# Altium PCB sensorbox.PcbDoc (part 1 of 2)
Units mil, origin at the board's own origin, x right, y up, seen from the top; angles counter-clockwise.
Board outline 2706 x 4143.13 mil, 2 copper layers (Top Layer, Bottom Layer), stack 61.855 mil thick; 118 components, 125 nets, 651 pads, 573 vias.
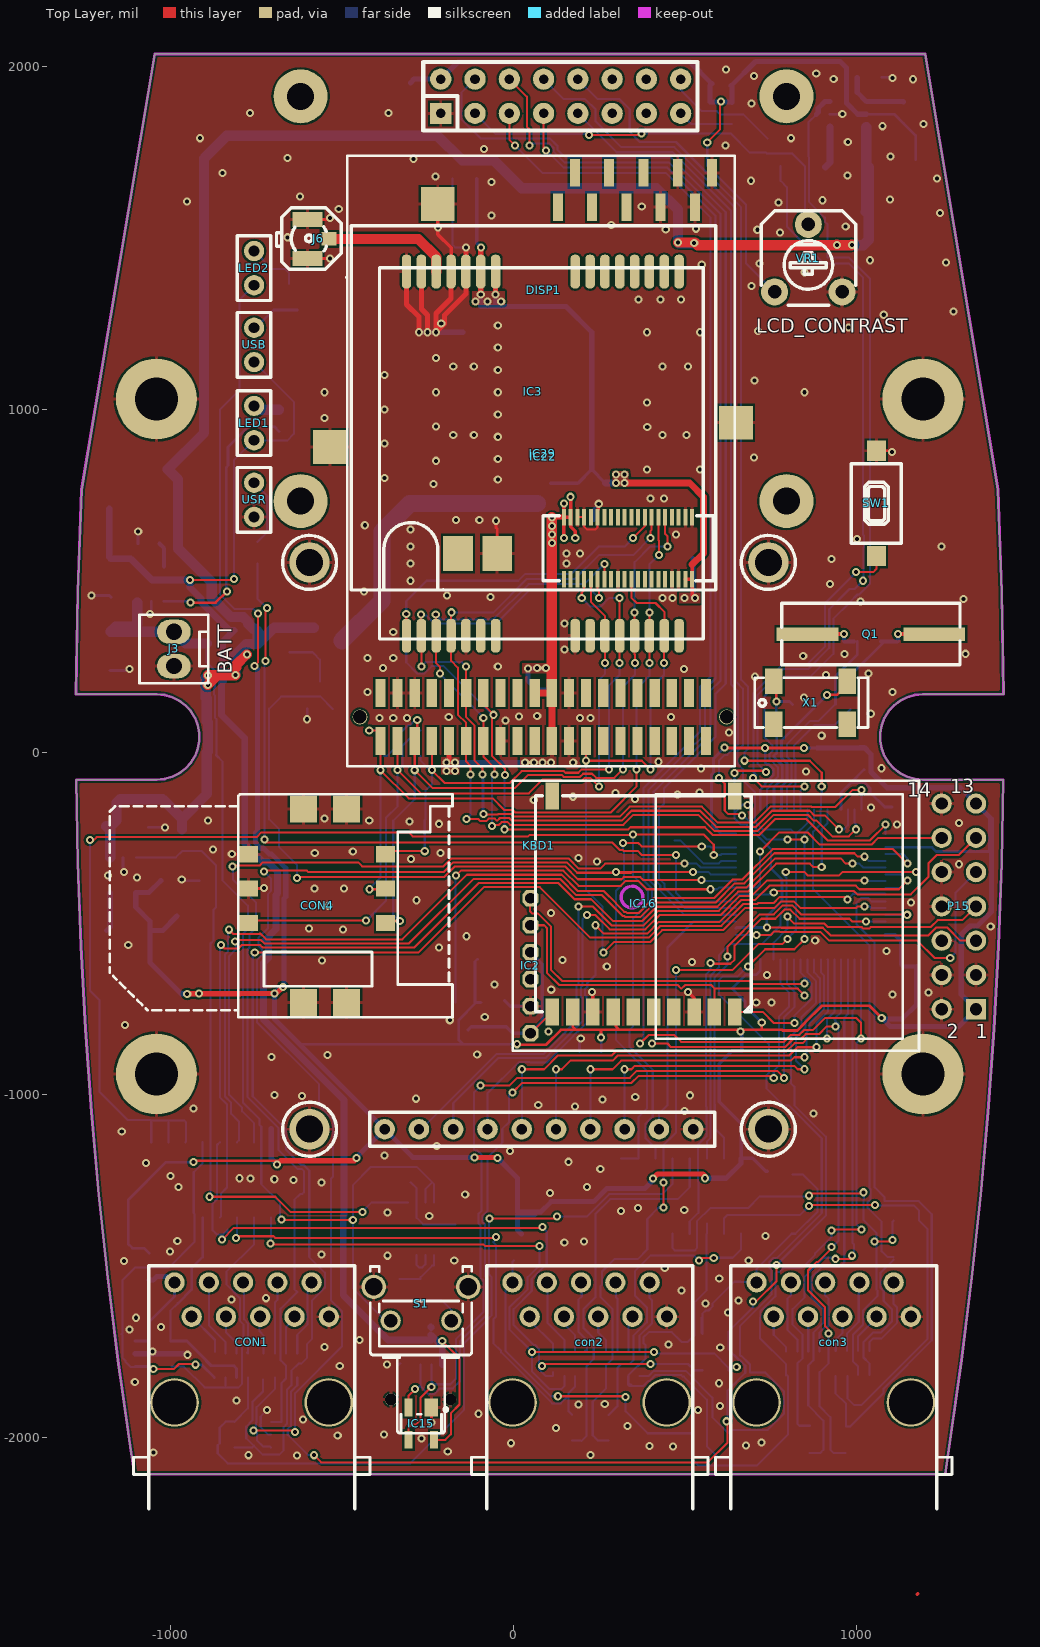
[diagram p0: Top Layer view]
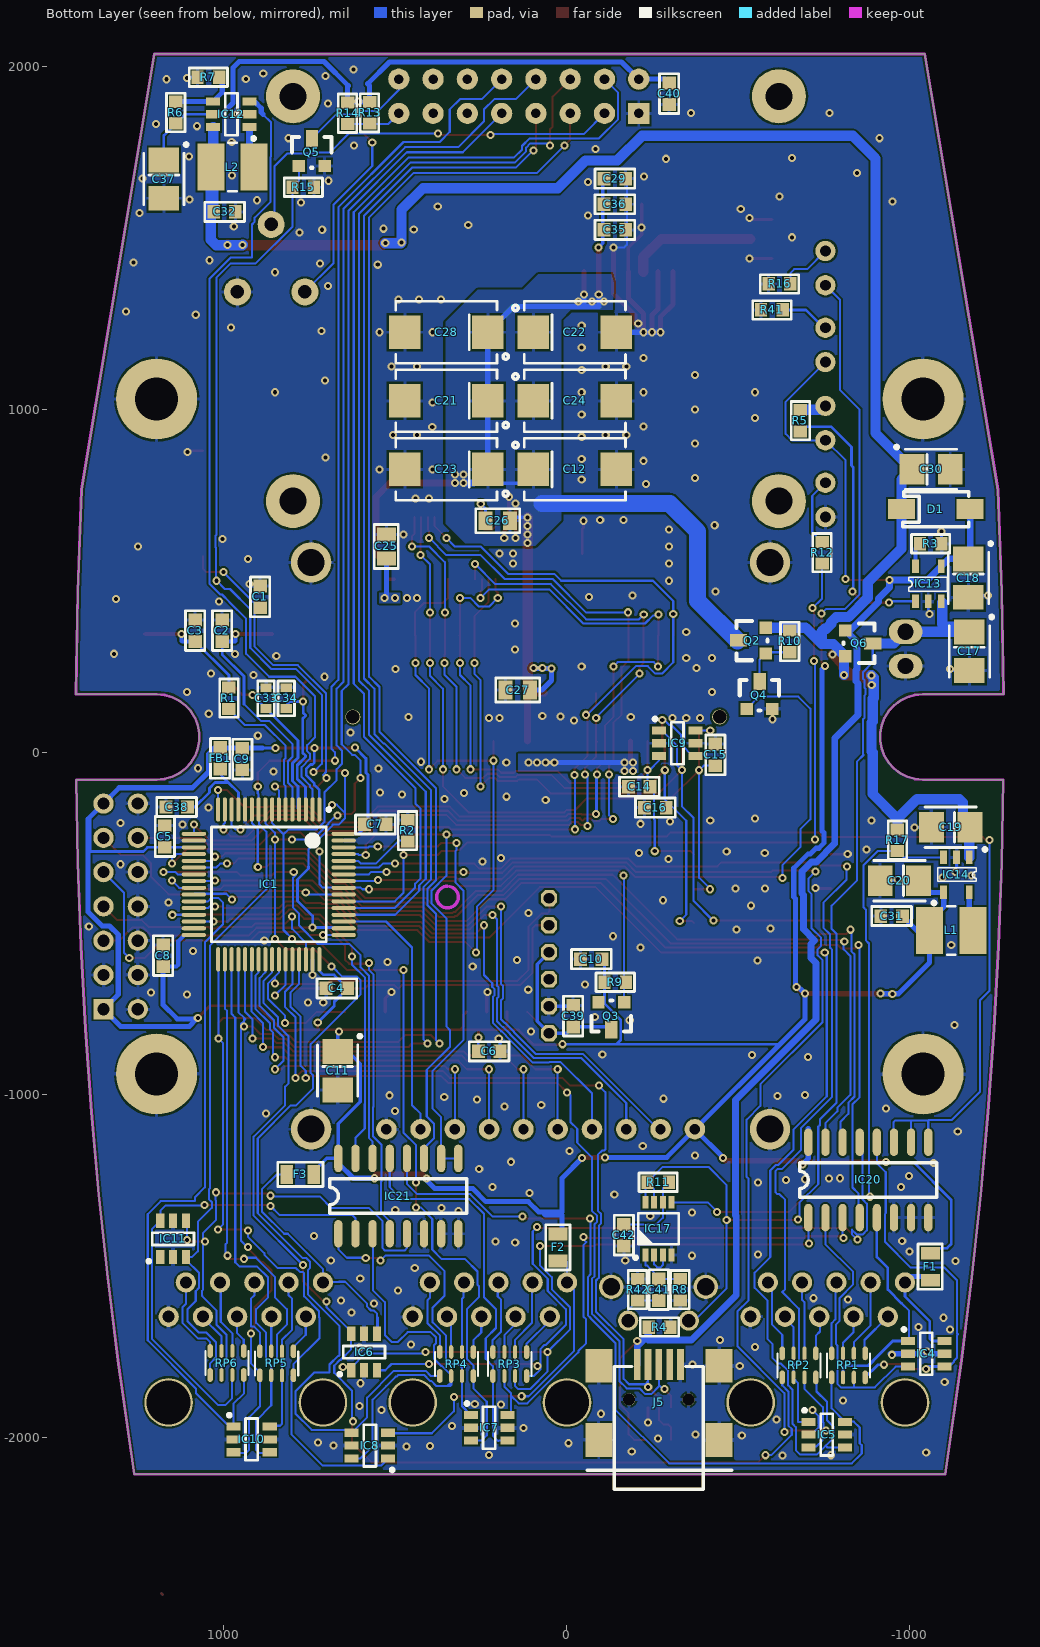
[diagram p1: Bottom Layer view, seen from below]
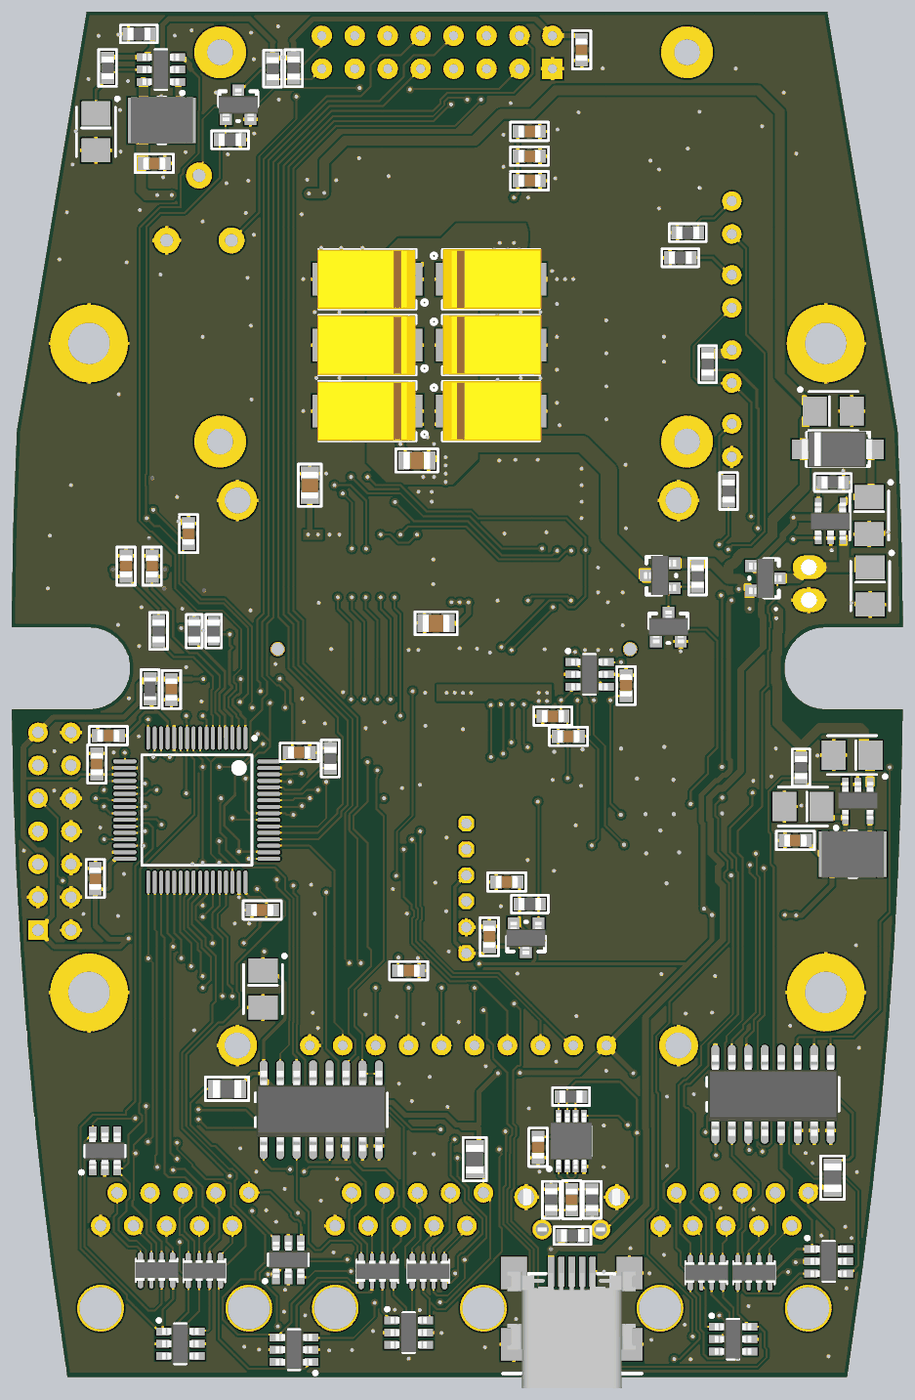
[diagram p3: 3D render of the assembled board from below, using the file's embedded part models]

## Layer stack, top to bottom
Top Layer: signal copper 1.4
Dielectric: core 59.0551, FR-4, Dk 4.8
Bottom Layer: signal copper 1.4

## Board outline
-1105.91,-2106.3 1260.72,-2106.31 1307.88,-1773.71 1337.8,-1532.86 1363.57,-1291.53 1385.16,-1049.79 1402.58,-807.71 1415.83,-565.37 1424.89,-322.83 1429.76,-80.18 1194.5,-80.18 1171.62,-78.06 1149.52,-71.77 1128.95,-61.53 1110.62,-47.68 1095.14,-30.7 1083.04,-11.16 1074.74,10.26 1070.52,32.85 1070.52,55.83 1074.74,78.42 1083.04,99.84 1095.14,119.38 1110.62,136.36 1128.96,150.21 1149.52,160.45 1171.62,166.74 1194.5,168.86 1430.42,168.86 1425.38,467.45 1414.02,765.87 1202.17,2036.82 -1045.83,2036.82 -1259.18,765.88 -1270.55,467.46 -1275.59,168.87 -1039.68,168.87 -1016.8,166.75 -994.7,160.46 -974.13,150.21 -955.79,136.37 -940.31,119.39 -928.22,99.85 -919.91,78.42 -915.69,55.84 -915.69,32.86 -919.92,10.27 -928.22,-11.15 -940.31,-30.69 -955.79,-47.67 -974.13,-61.52 -994.7,-71.76 -1016.8,-78.05 -1039.68,-80.17 -1274.94,-80.17 -1270.07,-322.82 -1261.01,-565.36 -1247.76,-807.7 -1230.34,-1049.77 -1208.75,-1291.52 -1182.99,-1532.85 -1153.07,-1773.7

## Design rules (kind name [scope] priority, off if disabled: settings)
Clearance [All] p1: gap=6
ComponentClearance Obudowa [(InComponentClass('kolizja z obudowa'))] p1: gap=0 collisioncheckmode=3 verticalgap=0 showdistances=FALSE // Ignorujemy kolizje z obudowa
ComponentClearance modemy_GSM [(InComponentClass('modemy_GSM')) vs (InComponentClass('modemy_GSM'))] p2: gap=0 collisioncheckmode=3 verticalgap=0 showdistances=FALSE
ComponentClearance ComponentClearance_1 [All] p3: gap=10 collisioncheckmode=3 verticalgap=0 showdistances=FALSE
HoleSize [All] p1: absolutevalues=TRUE maxlimit=200 minlimit=11.81 maxpercent=80.000 minpercent=20.000
MinimumSolderMaskSliver [All] p1: minsoldermaskwidth=0
PlaneConnect [All] p1: planeconnectstyle=Direct reliefexpansion=20 reliefentries=4 reliefconductorwidth=10 reliefairgap=10
PolygonConnect PolygonConnect_1 [(InPadClass('All Pads'))] p1: connectstyle=Relief reliefconductorwidth=10 reliefentries=4 polygonreliefangle="90 Angle"
PolygonConnect [All] p2: connectstyle=Direct reliefconductorwidth=10 reliefentries=4 polygonreliefangle="90 Angle"
RoomDefinition U_sensorbox_1 [InComponentClass('U_sensorbox_1')] p1 off: confinementstyle=ConfineIn formatcopy=TRUE lockcomponents=FALSE outline 574,-1650 647,-1650 647,-1094.96 574,-1094.96
RoomDefinition supply_kbd_lcd [InComponentClass('supply_kbd_lcd')] p2 off: confinementstyle=ConfineIn formatcopy=TRUE lockcomponents=FALSE outline 695,-1331 -449,-1331 -449,216 695,216
RoomDefinition "alt modem" [InComponentClass('alt modem')] p3 off: confinementstyle=ConfineIn formatcopy=TRUE lockcomponents=FALSE outline -11417.32,-5314.96 -9417.32,-5314.96 -9417.32,-4314.96 -11417.32,-4314.96
RoomDefinition U_rj50 [InComponentClass('U_rj50')] p4 off: confinementstyle=ConfineIn formatcopy=TRUE lockcomponents=FALSE outline -11417.32,-5314.96 -9417.32,-5314.96 -9417.32,-4314.96 -11417.32,-4314.96
RoomDefinition mikrokontroler [InComponentClass('mikrokontroler')] p5 off: confinementstyle=ConfineIn formatcopy=TRUE lockcomponents=FALSE outline 1140,-1750 844.25,-1750 844.25,-1950 1140,-1950
RoutingVias [All] p1: holewidth=11.81 width=23.62 viastyle="Through Hole" minholewidth=11.81 minwidth=23.62 maxholewidth=15.75 maxwidth=31.5
SilkToSilkClearance [All] p1: silktosilkclearance=0
SilkscreenOverComponentPads [All] p1: minsilkscreentomaskgap=0
SolderMaskExpansion [All] p1: expansion=4
ViasUnderSMD [All] p1: allowed=FALSE
Width [All] p1: maxlimit=100 minlimit=6 preferedwidth=10 minimp=50.000000 maximp=50.000000 favimp=50.000000
22 further rules are at their usual default settings.

## Classes and differential pairs
component class U_rj50: con1 con2 con3 F1 F2 F3 IC4 IC5 IC6 IC7 IC8 IC10 IC11 RP1 RP2 RP3 RP4 RP5 RP6
component class U_sensorbox_1: C12 C14 C15 C16 C21 C22 C23 C24 C25 C26 C28 C39 CON4 IC2 IC3 IC9 IC16 IC20 IC21 Q2 Q3 Q4 R9 R10
component class "alt modem": C27 C29 C35 C36 IC22 IC29 J6
component class mikrokontroler: C1 C2 C3 C4 C5 C6 C7 C8 C9 C10 C11 C33 C34 C38 FB1 IC1 P15 Q1 R1 R2 R12 SW1 USR X1
component class supply_kbd_lcd: C17 C18 C19 C20 C30 C31 C32 C37 C40 C41 C42 D1 DISP1 IC12 IC13 IC14 IC15 IC17 J3 J5 KBD1 L1 L2 LED1 LED2 Q5 Q6 R3 R4 R5 R6 R7 R8 R11 R13 R14 R15 R16 R17 R41 R42 S1 USB VR1

## Components (designator, comment, footprint, x,y, rotation, side; value= is the part's Value field where it differs from the comment)
C1 "100n" 0603C 893,453 r90 bottom
C2 "22p" 0603C 1003.94,354.33 r90 bottom locked
C3 "22p" 0603C 1082.68,354.33 r90 bottom locked
C4 "100n" 0603C 669.29,-688.98 r0 bottom locked
C5 "100n" 0603C 1171.26,-246.06 r90 bottom locked
C6 "100n" 0603C 225,-873 r180 bottom
C7 "100n" 0603C 557,-211 r180 bottom
C8 "100n" 0603C 1176.14,-593.7 r90 bottom locked
C9 "100n" 0603C 945,-20 r270 bottom
C10 "1u" 0603C -73,-604 r0 bottom
C11 "10u/10V" 1411_SMDB 667,-929 r270 bottom
C12 "ET220/10D-JP" 2917_SMDD -25,825 r180 bottom locked
C14 "100n" 0603C -213,-101 r0 bottom
C15 "33p" 0603C -435,-8 r90 bottom
C16 "33p" 0603C -260,-162 r0 bottom
C17 "10u/6,3V" 1411_SMDB -1176,294 r270 bottom
C18 "10u/6,3V" 1411_SMDB -1173,508 r270 bottom
C19 "10u/6,3V" 1411_SMDB -1121,-219 r0 bottom
C20 "10u/6,3V" 1411_SMDB -972,-375 r0 bottom
C21 "ET220/10D-JP" 2917_SMDD 350,1025 r0 bottom locked
C22 "ET220/10D-JP" 2917_SMDD -25,1225 r180 bottom
C23 "ET220/10D-JP" 2917_SMDD 350,825 r0 bottom locked
C24 "ET220/10D-JP" 2917_SMDD -25,1025 r180 bottom
C25 "10u/10V" 0805C 525,600 r270 bottom locked
C26 "10u/10V" 0805C 200,675 r0 bottom locked
C27 "10u" 0805C 141.73,181.1 r0 bottom
C28 "ET220/10D-JP" 2917_SMDD 350,1225 r0 bottom locked
C29 "1u" 0603C -141.73,1673.23 r180 bottom
C30 "10u/6,3V" 1411_SMDB -1064,825 r180 bottom
C31 "100n" 0603C -949,-478 r0 bottom
C32 "100n" 0603C 997,1576 r180 bottom
C33 "u1" 0603 875.98,157.48 r90 bottom locked
C34 "u1" 0603 816.93,157.48 r90 bottom locked
C35 "10p" 0603C -141.73,1523.62 r180 bottom
C36 "33p" 0603C -141.73,1598.43 r180 bottom
C37 "10u/6,3V" 1411_SMDB 1174,1672 r270 bottom
C38 "1u" 0603C 1136.61,-160 r0 bottom
C39 "100n" 0603C -20,-770 r90 bottom
C40 "100n" 0603C -300,1921 r270 bottom
C41 "1n" 0603C -270,-1568 r90 bottom
C42 "100n" 0603C -168,-1409 r90 bottom
CON1 "TJACKG10P10C06" TJACKM10P10C03Y-LF -1063,-2207 r0 top locked (schematic designator con1)
con2 "TJACKG10P10C06" TJACKM10P10C03Y-LF -77,-2207 r0 top locked
con3 "TJACKG10P10C06" TJACKM10P10C03Y-LF 635,-2207 r0 top locked
CON4 "CARD-SIME6C10" CON_CARD-SIME6C10 -572,-448 r270 top locked
D1 "SS14" DO-214AC/SMA -1078,709 r0 bottom
DISP1 "PBD16S + LCMFD0802C6NBLWC" IDC16 -698.82,2047.24 r0 top locked
F1 "RFSI005" 0805R -1062,-1501 r90 bottom
F2 "RFSI005" 0805R 24,-1445 r90 bottom
F3 "RFSI005" 0805R 776,-1232 r180 bottom
FB1 "100R/1A" 0603L 1010,-18 r270 bottom
IC1 "STM32F103RBT6" LQFP64_N 867.95,-385.83 r270 bottom locked
IC2 "SKM53" RF_GPS_SKM53 50,-820 r180 top locked
IC3 "HiLo modem" MOLEX_54102-0403 335,595 r0 top locked
IC4 "PESD3V3S4UD" SOT23-6 -1050,-1755 r180 bottom locked
IC5 "PESD3V3S4UD" SOT23-6 -760,-1991 r180 bottom locked
IC6 "PESD3V3S4UD" SOT23-6 590,-1750 r90 bottom locked
IC7 "PESD3V3S4UD" SOT23-6 225,-1971 r180 bottom
IC8 "PESD3V3S4UD" SOT23-6 573,-2023 r0 bottom
IC9 "PESD3V3S4UD" SOT23-6 -324,26 r180 bottom
IC10 "PESD3V3S4UD" SOT23-6 918,-2005 r180 bottom locked
IC11 "PESD3V3S4UD" SOT23-6 1147,-1420 r90 bottom locked
IC12 "MCP1624" SOT23-6 977,1861 r0 bottom
IC13 "MCP73831T-2ACI" SOT23-5 -1056,491 r90 bottom
IC14 "MCP1603T-330I" SOT23-5 -1138,-358 r270 bottom
IC15 "PRTR5V0U2X" sot143b -270,-1957 r180 top
IC16 "GPS-FGPMMOPA6B" GPS-FGPMMOPA6B 380,-442.5 r90 top locked
IC17 "74LVC1G74DP" SOP65P400X110-8N -269,-1390 r90 bottom
IC20 "74HC4053D" SO-16 -706,-1358 r90 bottom
IC21 "74HC4053D" SO-16 665,-1405 r90 bottom locked
IC22 "PBHTD40SPP + PBHTS10S-ZTE + MG3006" MG3006 580,1640 r0 top locked
IC29 "QUECTEL_M72" QUECTEL_M72 -390,330 r90 top locked
J3 "WF02S-LF" CON_WF02S-LF -990,351 r180 top
J5 "USBMS1B5-CV" USBMS1B5-CV -270,-1741 r180 bottom locked
J6 "U.FL-R-SMT-1(10)" CON_UFL_HIROSE_RECEPTACLE -600,1440 r270 top
KBD1 "PB10S-LF" KBD -712.4,632.28 r0 top locked
L1 "DLPW1812-100" PW4532 -1123,-520 r0 bottom
L2 "DLPW1812-100" PW4532 974,1707 r180 bottom
LED1 "L-13ID" LED_L-13ID -756,960 r90 top
LED2 "L-13GD" LED_L-13GD -756,1412 r90 top
P15 "PLMD14S-LF" HDR2X7H 1350,-750 r90 top
Q1 "8MHz" HC-49SM 1043.31,344.49 r0 top locked
Q2 "DMP2035U" sot-23 -582,288 r90 bottom
Q3 "DMP2035U" sot-23 -169,-730 r0 bottom
Q4 "BSS138" sot-23 -526,126 r180 bottom
Q5 "BSS138" SOT-23 780,1710 r180 bottom
Q6 "DMP2035U" sot-23 -814,355 r270 bottom
R1 "100" 0603R 984.25,157.48 r270 bottom locked
R2 "10k" 0603R 463,-229 r90 bottom
R3 "2k1" 0603R -1063,608 r0 bottom
R4 "10k" 0603R -272,-1677 r0 bottom
R5 "1k" 0603R -683,967 r270 bottom
R6 "30k" 0603R 1139,1866 r270 bottom
R7 "10k" 0603R 1044,1969 r180 bottom
R8 "1k" 0603R -332,-1568 r90 bottom
R9 "10k" 0603R -143,-671 r0 bottom
R10 "10k" 0603R -652,323 r90 bottom
R11 "1M" 0603R -268,-1255 r180 bottom
R12 "220R" 0603R -746,582 r90 bottom
R13 "100R" 0603R 574,1865 r90 bottom
R14 "100R" 0603R 638,1864 r90 bottom
R15 "10k" 0603R 767,1648 r0 bottom
R16 "1k" 0603R -622,1366 r0 bottom
R17 "1k" 0603R -966,-257 r90 bottom
R41 "1k" 0603R -600,1290 r0 bottom
R42 "1M" 0603R -208,-1568 r90 bottom
RP1 "RAC4X101" CAY-16 -823,-1789 r270 bottom locked
RP2 "RAC4X101" CAY-16 -679,-1789 r270 bottom locked
RP3 "RAC4X101" CAY-16 165,-1785 r270 bottom locked
RP4 "RAC4X101" CAY-16 320,-1785 r270 bottom locked
RP5 "RAC4X101" CAY-16 845,-1783 r270 bottom locked
RP6 "RAC4X101" CAY-16 990,-1782 r270 bottom locked
S1 "TACTR75H84B160" PB_ALPS_SKHHLQA010 -269,-1609 r90 top locked
SW1 "TACTD37H25I180" TACTD37H25I180 1059.45,879.33 r270 top locked
USB "L-13YD" LED_L-13YD -756,1188 r90 top
USR "L-13YD" LED_L-13YD -756,736 r270 top
VR1 "10k" POT_RM6v 861,1441 r180 top
X1 "32.768kHz" crystal_85SMX 944.88,206.69 r180 top locked

## Footprints (in the part's own frame and the unit in brackets; to place one, negate y for a bottom-side part, rotate by r counter-clockwise, add the part's x,y. Pads: shape width x height; smd on the part's side, far side on the other; paste and mask are expansions set on the pad)
0603 [mm]
  rect 0.65x0.85 smd: 1(-0.775,0) 2(0.775,0)
  silkscreen extent -1.3,-0.61 1.27,0.61, body extent -0.87,-0.47 0.88,0.48, height 0.55
0603C [mm]
  rect 0.95x1 smd: 1(-0.8,0) 2(0.8,0)
  silkscreen extent -1.47,-0.71 1.47,0.71, body extent -0.87,-0.47 0.88,0.48, height 0.87
0603L [mm]
  rect 0.95x1 smd: 1(-0.8,0) 2(0.8,0)
  silkscreen extent -1.47,-0.71 1.47,0.71, body extent -0.87,-0.47 0.88,0.48, height 0.7
0603R [mm]
  rect 0.9x1 smd: 1(-0.8,0) 2(0.8,0)
  silkscreen extent -1.42,-0.69 1.42,0.69, body extent -0.87,-0.47 0.88,0.48, height 0.55
0805C [mm] "Molded Capacitor, 2-Leads, Body 3,2x1,6mm, IPC Medium Density"
  rect 1.05x1.4 smd: 1(-0.9,0) 2(0.9,0)
  silkscreen extent -1.63,-0.89 1.63,0.89, body extent -1.05,-0.67 1.05,0.68, height 1.25
0805R [mm]
  rect 0.95x1.4 smd: 1(-1,0) 2(1,0)
  silkscreen extent -1.68,-0.89 1.68,0.91, body extent -1.1,-0.67 1.1,0.68, height 0.6
1411_SMDB [mm]
  rect 1.85x2.25 smd: 1(-1.425,0) 2(1.425,0)
  silkscreen extent -2.67,-1.5 1.9,1.77, body extent -1.85,-1.5 1.85,1.5, height 2.1
2917_SMDD [mm]
  rect 2.35x2.5 smd: 1(-3.075,0) 2(3.075,0)
  silkscreen extent -4.6,-2.3 3.75,2.3, body extent -3.72,-2.29 3.88,2.31, height 4.3
CAY-16 [mil]
  oval 40x16 smd: 1(-35,49) 4(-35,-49) 5(35,-49) 8(35,49)
  oval 40x12 smd: 2(-35,15.75) 3(-35,-15.75) 6(35,-15.75) 7(35,15.75)
  silkscreen extent -35,-63 35,63, body extent -31,-65 32,65, height 20
CON_CARD-SIME6C10 [mm]
  rect 1.2x1.4 smd: C1(-3.81,5.08) C2(-1.27,5.08) C3(1.27,5.08) C4(-3.81,-5.08) C5(-1.27,-5.08) C6(1.27,-5.08)
  rect 2x2 smd: G1(7.175,2.184) G2(7.175,-1.016) G3(-7.175,2.184) G4(-7.175,-1.016)
  silkscreen extent -8.26,-15.37 8.26,10.03, body extent -8.1,-6.35 8.3,9.35, height 2.27
CON_UFL_HIROSE_RECEPTACLE [mm]
  rect 1x1.1 smd: 1(-1.45,1.6)
  rect 1.1x2.2 smd: 2(-2.9,0) 2a(0,0)
  silkscreen extent -3.75,-2.3 0.8,2.5, body extent -3,-1.45 0,1.65, height 1.25
CON_WF02S-LF [mm]
  oval 2.5x1.8 hole 1.2 paste-1: 1(0,0) 2(0,2.54)
  silkscreen extent -2.54,-1.27 2.54,3.81, body extent -2.9,-1.27 2.9,3.81, height 11.7
crystal_85SMX [mm]
  rect 1.3x1.9 smd: 1(-0.762,0) 2(4.699,0) 3(4.699,3.175) 4(-0.762,3.175)
  silkscreen extent -2.29,-0.25 6.1,3.43, body extent -2.29,-0.25 6.1,3.43, height 2
DO-214AC/SMA [mm]
  rect 2x1.5 smd: A(-2.55,0) K(2.55,0)
  silkscreen extent -2.44,-1.3 2.44,1.3, body extent -2.67,-1.4 2.83,1.4, height 2.3
GPS-FGPMMOPA6B [mm]
  rect 2x1 smd: 1(-8,6.75) 2(-8,5.25) 3(-8,3.75) 4(-8,2.25) 5(-8,0.75) 6(-8,-0.75) 7(-8,-2.25) 8(-8,-3.75) 9(-8,-5.25) 10(-8,-6.75) 11(8,6.75) 12(8,-6.75)
  Keep-Out Layer lines w0.254: 1.284,1.007 ccw(c0.5,0.85) 1.3,0.85
  silkscreen extent -8,-8 8,8
HC-49SM [mil]
  rect 180x39.37 smd: 1(185,0) 2(-185,0)
  silkscreen extent -260,-90 260,90, body extent -250,-94 250,94, height 63
HDR2X7H [mm] "Connector; Header; 7x2 Position; Right Angle"
  rect 1.5x1.5 hole 0.9: 1(0,0)
  round 1.5 hole 0.9: 2(0,2.54) 3(2.54,0) 4(2.54,2.54) 5(5.08,0) 6(5.08,2.54) 7(7.62,0) 8(7.62,2.54) 9(10.16,0) 10(10.16,2.54) 11(12.7,0) 12(12.7,2.54) 13(15.24,0) 14(15.24,2.54)
IDC16 [mm]
  round 4 hole 2: 0a(2,-3.4) 0b(38,-3.4) 0c(2,-33.4) 0d(38,-33.4)
  rect 1.575x1.575 hole 0.711: 1(12.38,-4.67)
  round 1.575 hole 0.711: 2(12.38,-2.13) 3(14.92,-4.67) 4(14.92,-2.13) 5(17.46,-4.67) 6(17.46,-2.13) 7(20,-4.67) 8(20,-2.13) 9(22.54,-4.67) 10(22.54,-2.13) 11(25.08,-4.67) 12(25.08,-2.13) 13(27.62,-4.67) 14(27.62,-2.13) 15(30.16,-4.67) 16(30.16,-2.13)
  silkscreen extent 11.08,-5.93 31.4,-0.85, body extent -0.01,-35.49 40.01,0.01, height 21
KBD [mm]
  round 1.524 hole 0.762: 1(8.57,-44) 2(11.11,-44) 3(13.65,-44) 4(16.19,-44) 5(18.73,-44) 6(21.27,-44) 7(23.81,-44) 8(26.35,-44) 9(28.89,-44) 10(31.43,-44)
  round 3 hole 2: 10a(3,-2) 10b(37,-2) 10c(37,-44) 10d(3,-44)
  silkscreen extent 1,-46 39,0, body extent 0,-46 40,0, height 25.5
LED_L-13GD [mm]
  round 1.5 hole 0.8: A(-1.27,0) K(1.27,0)
  silkscreen extent -2.4,-1.25 2.4,1.25, body extent -2.4,-1.25 2.4,1.25, height 11.5
LED_L-13ID [mm]
  round 1.5 hole 0.8: A(-1.27,0) K(1.27,0)
  silkscreen extent -2.4,-1.25 2.4,1.25, body extent -2.4,-1.25 2.4,1.25, height 11.5
LED_L-13YD [mm]
  round 1.5 hole 0.8: A(-1.27,0) K(1.27,0)
  silkscreen extent -2.4,-1.25 2.4,1.25, body extent -2.4,-1.25 2.4,1.25, height 11.5
LQFP64_N [mm] "Thin QFP, 64-Leads, Body 10x10mm, Pitch 0.5mm, IPC Medium Density"
  oval 1.8x0.3 smd: 1(-5.55,3.75) 2(-5.55,3.25) 3(-5.55,2.75) 4(-5.55,2.25) 5(-5.55,1.75) 6(-5.55,1.25) 7(-5.55,0.75) 8(-5.55,0.25) 9(-5.55,-0.25) 10(-5.55,-0.75) 11(-5.55,-1.25) 12(-5.55,-1.75) 13(-5.55,-2.25) 14(-5.55,-2.75) 15(-5.55,-3.25) 16(-5.55,-3.75) 33(5.55,-3.75) 34(5.55,-3.25) 35(5.55,-2.75) 36(5.55,-2.25) 37(5.55,-1.75) 38(5.55,-1.25) 39(5.55,-0.75) 40(5.55,-0.25) 41(5.55,0.25) 42(5.55,0.75) 43(5.55,1.25) 44(5.55,1.75) 45(5.55,2.25) 46(5.55,2.75) 47(5.55,3.25) 48(5.55,3.75)
  oval 0.3x1.8 smd: 17(-3.75,-5.55) 18(-3.25,-5.55) 19(-2.75,-5.55) 20(-2.25,-5.55) 21(-1.75,-5.55) 22(-1.25,-5.55) 23(-0.75,-5.55) 24(-0.25,-5.55) 25(0.25,-5.55) 26(0.75,-5.55) 27(1.25,-5.55) 28(1.75,-5.55) 29(2.25,-5.55) 30(2.75,-5.55) 31(3.25,-5.55) 32(3.75,-5.55) 49(3.75,5.55) 50(3.25,5.55) 51(2.75,5.55) 52(2.25,5.55) 53(1.75,5.55) 54(1.25,5.55) 55(0.75,5.55) 56(0.25,5.55) 57(-0.25,5.55) 58(-0.75,5.55) 59(-1.25,5.55) 60(-1.75,5.55) 61(-2.25,5.55) 62(-2.75,5.55) 63(-3.25,5.55) 64(-3.75,5.55)
  silkscreen extent -5.67,-4.25 4.25,4.57, body extent -5,-5 5,5, height 1.6
MG3006 [mm]
  round 1.1 hole 1 paste-1: 0(-26.09,-39.05) 0(1.08,-39.05)
  rect 0.76x2.05 smd paste-1: 1(-24.57,-37.275) 2(-24.57,-40.825) 3(-23.3,-37.275) 4(-23.3,-40.825) 5(-22.03,-37.275) 6(-22.03,-40.825) 7(-20.76,-37.275) 8(-20.76,-40.825) 9(-19.49,-37.275) 10(-19.49,-40.825) 11(-18.22,-37.275) 12(-18.22,-40.825) 13(-16.95,-37.275) 14(-16.95,-40.825) 15(-15.68,-37.275) 16(-15.68,-40.825) 17(-14.41,-37.275) 18(-14.41,-40.825) 19(-13.14,-37.275) 20(-13.14,-40.825) 21(-11.87,-37.275) 22(-11.87,-40.825) 23(-10.6,-37.275) 24(-10.6,-40.825) 25(-9.33,-37.275) 26(-9.33,-40.825) 27(-8.06,-37.275) 28(-8.06,-40.825) 29(-6.79,-37.275) 30(-6.79,-40.825) 31(-5.52,-37.275) 32(-5.52,-40.825) 33(-4.25,-37.275) 34(-4.25,-40.825) 35(-2.98,-37.275) 36(-2.98,-40.825) 37(-1.71,-37.275) 38(-1.71,-40.825) 39(-0.44,-37.275) 40(-0.44,-40.825)
  rect 0.74x2.03 smd paste-1: 51(0,1.27) 52(-1.27,-1.27) 53(-2.54,1.27) 54(-3.81,-1.27) 55(-5.08,1.27) 56(-6.35,-1.27) 57(-7.62,1.27) 58(-8.89,-1.27) 59(-10.16,1.27) 60(-11.43,-1.27)
  silkscreen extent -27.11,-42.71 1.68,2.54, body extent -27.03,-42.71 1.68,1.8, height 10
MOLEX_54102-0403 [mm]
  rect 0.3x1.2 smd: 1(-4.75,2.3) 2(-4.25,2.3) 3(-3.75,2.3) 4(-3.25,2.3) 5(-2.75,2.3) 6(-2.25,2.3) 7(-1.75,2.3) 8(-1.25,2.3) 9(-0.75,2.3) 10(-0.25,2.3) 11(0.25,2.3) 12(0.75,2.3) 13(1.25,2.3) 14(1.75,2.3) 15(2.25,2.3) 16(2.75,2.3) 17(3.25,2.3) 18(3.75,2.3) 19(4.25,2.3) 20(4.75,2.3) 21(-4.75,-2.3) 22(-4.25,-2.3) 23(-3.75,-2.3) 24(-3.25,-2.3) 25(-2.75,-2.3) 26(-2.25,-2.3) 27(-1.75,-2.3) 28(-1.25,-2.3) 29(-0.75,-2.3) 30(-0.25,-2.3) 31(0.25,-2.3) 32(0.75,-2.3) 33(1.25,-2.3) 34(1.75,-2.3) 35(2.25,-2.3) 36(2.75,-2.3) 37(3.25,-2.3) 38(3.75,-2.3) 39(4.25,-2.3) 40(4.75,-2.3)
  rect 2.5x2.5 smd: 41(-22.1,7.5) 42(8,9.3) 43(-14.1,25.5)
  rect 2.2x2.6 smd: 44(-9.7,-0.4) 45(-12.6,-0.4)
  silkscreen extent -20.5,-3.1 6.5,23.9, body extent -23.4,-3.2 9.2,26.7, height 4.8
PB_ALPS_SKHHLQA010 [mm] "Body 6x6mm, Stem height 8.35mm, Horizontal Pushbutton Switch, ALPS Serie SKHH"
  round 1.5 hole 1: 1(-1.25,-2.25) 2(-1.25,2.25)
  round 1.8 hole 1.3: 3(1.25,-3.5) 4(1.25,3.5)
  silkscreen extent -9.6,-3.75 2.75,3.75, body extent -9.6,-3.75 2.75,3.75, height 7.1
POT_RM6v [mm] "carbon variable resistor"
  round 2 hole 1: 1(-2.5,2.5) 2(0,-2.5) 3(2.5,2.5)
  silkscreen extent -3.5,-3.5 3.5,3.5, body extent -3.51,-3.5 3.51,3.5, height 3
PW4532 [mm] "Miniature Surface Mount Power Inductors, 4.5mm L X 3.3mm W X 2.9mm H, MURATA 8400 Serie"
  rect 2x3.5 smd: 1(-1.6,0) 2(1.6,0)
  silkscreen extent -0.3,-1.8 0.3,1.8, body extent -2.4,-1.8 2.4,1.8, height 2.9
QUECTEL_M72 [mm]
  rrect80% 2.5x0.7 smd: 1(0.25,-2) 2(0.25,-3.1) 3(0.25,-4.2) 4(0.25,-5.3) 5(0.25,-6.4) 6(0.25,-7.5) 7(0.25,-8.6) 8(0.25,-14.5) 9(0.25,-15.6) 10(0.25,-16.7) 11(0.25,-17.8) 12(0.25,-18.9) 13(0.25,-20) 14(0.25,-21.1) 15(0.25,-22.2) 16(27.225,-22.2) 17(27.225,-21.1) 18(27.225,-20) 19(27.225,-18.9) 20(27.225,-17.8) 21(27.225,-16.7) 22(27.225,-15.6) 23(27.225,-14.5) 24(27.225,-8.6) 25(27.225,-7.5) 26(27.225,-6.4) 27(27.225,-5.3) 28(27.225,-4.2) 29(27.225,-3.1) 30(27.225,-2)
  silkscreen extent 0,-24 27.5,0, body extent 0,-24 27.5,0, height 3.6
RF_GPS_SKM53 [mm]
  oct 1.2x1.2 hole 0.8: 1(0,0) 2(0,-2) 3(0,-4) 4(0,-6) 5(0,-8) 6(0,-10)
  silkscreen extent -28.8,-18.7 1.3,1.3, body extent -28.83,-18.8 1.27,1.27, height 8.5
SO-16 [mil]
  oval 80x24 smd: 1(0,0) 2(0,-50) 3(0,-100) 4(0,-150) 5(0,-200) 6(0,-250) 7(0,-300) 8(0,-350) 9(220,-350) 10(220,-300) 11(220,-250) 12(220,-200) 13(220,-150) 14(220,-100) 15(220,-50) 16(220,0)
  silkscreen extent 60,-375 160,25, body extent -16,-372 228,22, height 69
SOP65P400X110-8N [mm] "SOP, 0.65mm, pitch; 8 pin, 3.00mm W X 3.00mm L X 1.10mm H body, PC Medium Density"
  rect 0.95x0.45 smd: 1(-1.95,0.975) 2(-1.95,0.325) 3(-1.95,-0.325) 4(-1.95,-0.975) 5(1.95,-0.975) 6(1.95,-0.325) 7(1.95,0.325) 8(1.95,0.975)
  silkscreen extent -2.27,-1.5 1.15,1.83, body extent -2.15,-1.57 2.15,1.58, height 1.1
SOT23-5 [mil]
  rect 39x19.68 smd: 1(-51,37.5) 2(-51,0) 3(-51,-37.5) 4(51,-37.5) 5(51,37.5)
  silkscreen extent -21,-55 19,58, body extent -57,-59 56,60, height 48
SOT23-6 [mm]
  rect 1.05x0.6 smd: 1(-1.35,0.95) 2(-1.35,0) 3(-1.35,-0.95) 4(1.35,-0.95) 5(1.35,0) 6(1.35,0.95)
  silkscreen extent -1.78,-1.55 0.45,1.92, body extent -1.4,-1.5 1.4,1.5, height 1.45
sot143b [mm]
  rect 1x1.3 smd: 1(-0.8,-1.149)
  rect 0.6x1.3 smd: 2(0.9,-1.149) 3(0.9,1.251) 4(-1,1.251)
  silkscreen extent -1.99,-1.12 1.45,0.75, body extent -1.55,-1.2 1.45,1.3, height 1.1
sot-23 [mil]
  rect 36x36 smd: 1(0,0) 2(75,0)
  rect 36x50 smd: 3(38,80)
  silkscreen extent -20,-5 95,85, body extent -21,-5 97,93, height 47
SOT-23 [mil]
  rect 36x36 smd: 1(0,0) 2(75,0)
  rect 36x50 smd: 3(38,80)
  silkscreen extent -20,-5 95,85, body extent -21,-5 97,93, height 47
TACTD37H25I180 [mm]
  rect 1.5x1.4 smd: 1(0,0) 2(7.8,0)
  silkscreen extent 0.95,-1.85 6.85,1.85, body extent -1.19,-1.77 8.81,1.73, height 4.3
TJACKM10P10C03Y-LF [mm]
  round 1.5 hole 0.889: 1(1.905,16.764) 2(3.175,14.224) 3(4.445,16.764) 4(5.715,14.224) 5(6.985,16.764) 6(8.255,14.224) 7(9.525,16.764) 8(10.795,14.224) 9(12.065,16.764) 10(13.335,14.224)
  round 3.6 hole 3.25: 11b(13.335,7.874) ""(1.905,7.874)
  silkscreen extent -1.14,0 16.38,18, body extent -1.27,0 16.51,18, height 12.6
USBMS1B5-CV [mm] "mini USB-AB (Maritex)"
  rect 2x2.5 smd: 0a(4.45,-1.25) 0b(-4.45,-1.25) 0c(-4.45,-6.75) 0d(4.45,-6.75)
  round 0.9 hole 0.9 unplated: 0b(-2.2,-3.75) 0b(2.2,-3.75)
  rect 0.5x2.3 smd: 1(-1.6,-1.15) 2(-0.8,-1.15) 3(0,-1.15) 4(0.8,-1.15) 5(1.6,-1.15)
  silkscreen extent -5.3,-10.4 5.4,-1.3, body extent -4.95,-10.15 4.95,-1.15, height 4.07

## Part data
C1 C2 C3 C4 C5 C6 C7 C8 C9 C10 C14 C15 C16 C27 C29 C31 C32 C33 C34 C35 C36 C38 C39 C40 C41 C42: library part CAP_general, "Capacitor"
C11 C17 C18 C19 C20 C30 C37: library part CAP_TANTALIUM, "Tantalium Capacitor"
C12 C21 C22 C23 C24 C28: library part CAP_TANT_SMDD, "Tantalium Capacitor"
C25 C26: library part CAP_SMD_0805, "Capacitor SMD"
CON1 con2 con3: library part CON_RJ50, "10P10C Unshielded Connector (Maritex)"
CON4: library part CON_CARD-SIME6C10, "Sim Card Holder (Maritex)"
D1: library part D_LS101A, "Schottky, 60V, 1A"
DISP1: library part LCD_HD44780_LED, "LCD character display socket with backlight"
F1 F2 F3: library part F_PTC_0.1A, "polymer FUSE Maritex"
FB1: library part L_FERRITE_BEAD_0603, "ferrite bead 100R@100MHz 1A"
IC1: "STM32 ARM-based 32-bit MCU with 128 Kbytes Flash, 64-pin LQFP, Industrial Temperature"
IC2: library part RF_GPS_SKM53, "GPS receiver"
IC3: library part "RF_GSM_Hilo (Sagem)", "GPRS/EDGE modem (Sagem)"
IC4 IC5 IC6 IC7 IC8 IC9 IC10 IC11: library part D_TVS_BZA462A, "Quadruple 4V ESD transient voltage suppressor"
IC12: library part DC/DC_MCP1640, "Adjustable 5V/350mA Step-up DC/DC converter (TME)"
IC13: library part REG_MCP73831, "Single-Cell, Fully Integrated Li-Ion charger"
IC14: library part PWM_MCP1603T, "3.3V. 500mA buck regulator"
IC15: library part D_TVS_PRTR5V0U2X, "dual 5.5 ESD transient voltage suppressor"
IC16: library part RF_GPS_FGPMMOPA6B, "GPS receiver (Maritex)"
IC17: "Single D-type flip-flop with set and reset, positive edge trigger"
IC20 IC21: library part 4053
IC22: library part RF_GSM_MG3006
J3: library part Battery, "Multicell Battery"
J5: library part CON_USB_B_MINI, "USB mini B connector (Maritex)"
J6: library part CON_UFL_SMD, "UFL"
KBD1: library part KBD_4x4_10pin
L1 L2: library part L_POWER_PW4532, "SMT power inductor , Maritex,"
LED1: library part LED_THT_2mm_R, "LED (TME)"
LED2: library part LED_THT_2mm_G, "LED (TME)"
P15: library part "Header 7X2H", "Header, 7-Pin, Dual row, Right Angle"
Q1: library part "Quartz Crystal", "Quartz Crystal"
Q2 Q3 Q6: library part Q_BSS84, "P MOSFET 50V, 0.36W, 0.15A"
Q4 Q5: library part Q_BSS138
R1 R2 R3 R4 R5 R6 R7 R8 R9 R10 R11 R12 R13 R14 R15 R16 R17 R41 R42: library part RES_0603, "SMD Resistor"
RP1 RP2 RP3 RP4 RP5 RP6: library part RES_ARRAY_1206, "Resistor network 1206 (4x0402) Maritex RAC4Xxxx"
S1: library part SW-PB_RA_5.8mm, "Push button"
SW1: library part SW-TACT_SMD, "Push button"
USB USR: library part LED_THT_2mm_Y, "LED (TME)"
VR1: library part TRIMPOT_RM6_HOR, "Carbon trimpot, 0.1W, +/- 30%"
X1: library part X_CRYSTAL, "Crystal oscillator"

## Free pads (board coordinates)
  round 236.22 hole 125.98: 1(-1041,-939) 1(-1041,1030) 1(1195,-939) 1(1195,1030)

## Via types
v1: diameter 23.62, hole 11.81, Top Layer to Bottom Layer, tented both sides, 573 vias

## Nets (pads, with @x,y where several pads share a name; then routed paths per layer and width w, separated by ;. In a path a pad name is that pad's centre, name@x,y a point inside that pad or via, vN(x,y) a via of type N, cw(c..) or ccw(c..) an arc to the next point about the centre after c; other vN are vias at no path point)
3V3: C4.1 C5.1 C6.1 C7.1 C8.1 C9.1 C10.1 C11.1 C20.1 C31.1 F1.2 F2.2 F3.2 FB1.1 IC1.1 IC1.19 IC1.32 IC1.48 IC1.64 IC14.4 IC16.2 IC16.4 IC20.16 IC21.16 KBD1.1 L1.2 LED2.A P15.1 P15.13 Q3.2 R9.2 | length 12498.5
  Top Layer w6: v1(-755,250.97) -745,260.97 v1(-745,405)
  Top Layer w8: v1(-933,-1196) -929,-1192 -678,-1192 ; v1(11,-852) 12.62,-853.62 95.22,-853.62 138.85,-810 183.03,-810 ; IC16.2@173.31,-757.46 173.31,-800.28 183.03,-810 ; v1(256,-833) 256,-811 255,-810 ; IC16.4@291.42,-757.46 300,-766.04 300,-800 310,-810 ; v1(616,13) 617.19,11.81 v1(735,11.81) v1(848.43,11.81) ; v1(725,-789) 725,-810 ; v1(1075,-775) 1040,-740 900,-740 850,-790 850,-790.85 829.03,-811.81 786,-811.81 784.19,-810 725,-810 ; 183.03,-810 255,-810 ; 255,-810 310,-810 ; 310,-810 663,-810 725,-810
  Top Layer w10: v1(663,-815) v1@663,-810
  Top Layer w15: v1(-951,-705) -797,-705 -796,-704 v1(-696,-704) -691,-704 v1(-672,-685) ; v1(-688.68,-1202.69) -678,-1192 -463,-1192 -457,-1186 v1(-457,-1184) ; v1(-113,-1183) -47,-1183 v1(-46,-1184) ; v1(408,-1244) 421.31,-1230.69 553.69,-1230.69 561,-1238 560,-1239 v1(560,-1243)
  Bottom Layer w6: LED2.A@-756,1362 -799.03,1318.97 -799.03,1056.15 -855.81,999.37 -855.81,460.38 -813.43,418 -758,418 v1(-745,405)
  Bottom Layer w8: F1.2@-1062,-1461.63 -1076.63,-1447 -1111,-1447 -1123,-1435 -1123,-1306 -1013,-1196 v1(-933,-1196) ; -622.5,-852.5 -622,-852 -146.14,-852 ; C10.1@-104.5,-604 -111.5,-611.01 R9.2@-111.5,-671 Q3.2@-111.5,-733.36 ; Q3.2@-94,-730 -108.14,-730 Q3.2@-111.5,-733.36 ; v1(11,-852) -146.14,-852 ; v1(256,-833) 256.5,-833.5 C6.1@256.5,-873 ; C7.1@580.55,-211.82 606.92,-238.19 IC1.64@649.45,-238.19 ; C7.1@588.5,-211 578.19,-200.69 578.19,-65.97 584,-60.15 584,-18 585,-18 v1(616,13) ; IC1.48@720.31,-604.33 720.31,-637.95 708.66,-649.61 677.17,-649.61 C4.1@637.8,-688.98 677,-728.18 677,-741 v1(725,-789) ; IC1.1@720.31,-167.32 720.31,-110.31 735,-95.63 735,-90.85 758.81,-67.03 758.81,-48.97 746.03,-36.19 740.96,-36.19 735,-30.23 v1(735,11.81) ; v1(848.43,11.81) 885.83,11.81 ; FB1.1@1023.62,11.81 1038.39,-2.95 1040.95,-2.95 ; IC1.19@1086.46,-277.56 C5.1@1171.26,-277.56 1221.66,-277.56 1233.63,-289.53 1393.03,-289.53 ; -146.14,-852 -159,-839.14 -159,-780.86 Q3.2@-111.5,-733.36
  Bottom Layer w10: v1(663,-815) 667,-819 C11.1@667,-872.9 637.1,-872.9 601,-909 601,-1020 665,-1084 IC21.16@665,-1185 699,-1185 737,-1223 F3.2@741.63,-1223
  Bottom Layer w12: IC1.32@1086.46,-533.46 1114.17,-533.46 1131.89,-551.18 1131.89,-620.08 1137.01,-625.2 C8.1@1176.14,-625.2
  Bottom Layer w15: C20.1@-1028.1,-375 -1062.1,-409 IC14.4@-1100.5,-409 -1101,-409.5 -1101,-452 -1060.01,-492.99 L1.2@-1060.01,-520 ; C31.1@-980.5,-478 -1022.5,-520 L1.2@-1060.01,-520 ; v1(-917,-704) -918,-705 v1(-951,-705) -969,-705 -1060.01,-613.99 L1.2@-1060.01,-520 ; v1(-755,250.97) -746,241.97 -746,-230 -751.31,-235.31 -751.31,-265.48 -736.48,-280.31 -728.49,-280.31 -712.11,-296.69 -705.75,-296.69 -663.69,-338.75 -663.69,-422.22 -668.19,-426.72 -668.19,-676.19 v1(-696,-704) -696,-779 -622.5,-852.5 KBD1.1@-375,-1100 ; IC20.16@-706,-1098.3 IC20.16@-706,-1138 -706,-1185.37 v1(-688.68,-1202.69) ; v1(-457,-1184) -457,-1182 KBD1.1@-375,-1100 ; v1(-113,-1183) -114,-1182 -293,-1182 KBD1.1@-375,-1100 ; v1(-46,-1184) 12,-1242 12,-1340 13,-1341 70,-1341 ; F2.2@24,-1405.63 12,-1393.63 12,-1350 61,-1350 70,-1341 ; v1(408,-1244) 408,-1249 384,-1273 273,-1273 234.69,-1311.31 110.69,-1311.31 81,-1341 70,-1341 ; v1(560,-1243) 621.06,-1243 665,-1199.06 IC21.16@665,-1185 ; 885.83,11.81 FB1.1@1023.62,11.81 ; FB1.1@1010,13.5 1024.5,13.5 1040.95,-2.95 1044.15,-6.15 1044.15,-57.94 1090.2,-104 1304,-104 P15.13@1350,-150 1393.03,-193.03 ; v1(1075,-775) v1@1078,-778 ; C8.1@1176.14,-625.2 1176.14,-736.86 1135,-778 v1@1078,-778 ; 1393.03,-289.53 1393.03,-193.03 ; v1@1078,-778 1100,-800 1300,-800 P15.1@1350,-750 1306.97,-706.97 1306.97,-532.18 1332.18,-506.97 1353.88,-506.97 1395,-465.85 1395,-195 1393.03,-193.03
5V: C37.1 C40.1 DISP1.2 IC12.5 R6.2 R13.2 R14.2 VR1.3 | length 2543.6
  Top Layer w6: v1(566,1779) 603,1816 603,1898 v1(606,1898)
  Bottom Layer w6: v1(566,1779) 566,1710 679,1597 679,1426.15 VR1.3@762.57,1342.57
  Bottom Layer w8: IC12.5@1030.15,1861 1112.5,1861 R6.2@1139,1834.5 1174,1799.5 C37.1@1174,1728.1
  Bottom Layer w15: C40.1@-300,1952.5 -289.11,1963.39 DISP1.2@-211.42,1963.39 -161.19,2013.61 515.39,2013.61 579,1950 574,1945 R13.2@574,1896.5 637,1896.5 R14.2@638,1895.5 638,1942 636,1944 707,2015 954,2015 972.28,1996.72 972.28,1893.72 1005,1861 IC12.5@1030.15,1861
ADC_CH8/TIM3_CH3/TIM1_CH2N: IC1.26 IC5.4 RP2.8 | length 4025.2
  Top Layer w6: v1(-754,-584) -276,-584 -85.68,-393.68 77.68,-393.68 225.2,-541.2 395.57,-541.2 429.78,-507 607.03,-507 671.03,-443 712,-443 715,-440 759.66,-440 776.47,-423.19 968.19,-423.19 v1(975,-430)
  Bottom Layer w6: IC5.4@-813.15,-2028.4 -761.94,-2028.4 -757,-2023.46 ; v1(-754,-584) -759.81,-589.81 -759.81,-1004.19 -662.35,-1101.65 -662.35,-1160.65 -618.56,-1204.44 -610.97,-1204.44 -595,-1220.41 -595,-1473 -549.47,-1518.53 -549.47,-1562.96 -587.47,-1600.96 -587.47,-1712.47 -601,-1726 -601,-1767 -617,-1783 -625.04,-1783 -647,-1804.96 -647,-1847.06 -660,-1860.06 -660,-1959.6 -669.81,-1969.41 -669.81,-2036.57 -682.45,-2049.21 -731.25,-2049.21 -757,-2023.46 ; RP2.8@-730,-1830 -730,-1865 -760.52,-1895.52 -760.52,-1949.58 -778.81,-1967.87 -778.81,-2001.65 -757,-2023.46 ; v1(975,-430) 992,-413 1084.1,-413 IC1.26@1086.46,-415.35
ADC_CH9/TIM3_CH4/TIM1_CH3N: IC1.27 IC10.1 RP6.8 | length 2044.3
  Bottom Layer w6: RP6.8@940,-1820 940,-1870 971.15,-1901.15 IC10.1@971.15,-1967.6 982.4,-1967.6 1080.13,-1869.87 1080.13,-1856.84 1221,-1715.97 1221,-1348 1183,-1310 1083,-1310 1083,-1298.6 1054.19,-1269.79 1054.19,-554.65 1049.54,-550 1000.98,-501.45 1000.98,-439.02 1015,-425 1035,-425 1045.04,-435.04 IC1.27@1086.46,-435.04
ADC_CH10/DISP_D1: DISP1.8 IC1.8 IC7.3 RP4.8 | length 5049.5
  Top Layer w6: v1(438,-1328) v1(438,-1256) ; v1(475,-635) 475,-635.81 639.19,-635.81 715,-560 785,-560 v1(800,-545)
  Bottom Layer w6: DISP1.8@88.58,1963.39 146.97,1905 210,1905 240,1875 240,1840 315,1765 470,1765 650,1585 650,205 670,185 670,20 654.19,4.19 654.19,-33.62 670,-49.43 670,-81.77 705.41,-117.18 705.41,-203.02 727.38,-225 810,-225 825,-240 ; IC7.3@278.15,-2008.4 247.4,-2008.4 232,-1993 232,-1895 271,-1856 RP4.8@271,-1820 271,-1789 289.25,-1770.75 289.25,-1624.25 255,-1590 255,-1557.5 259,-1553.5 259,-1515 295,-1479 363,-1479 391,-1451 391,-1362 425,-1328 v1(438,-1328) ; v1(438,-1256) 438,-1147 475,-1110 v1(475,-635) ; v1@799.41,-544.4 825,-518.81 825,-240 ; IC1.8@858.11,-167.32 858.11,-206.89 825,-240
ADC_CH11/DISP_D2: DISP1.9 IC1.9 IC8.4 RP4.5 | length 5468
  Top Layer w6: v1(600,-75) 617.06,-92.06 617.06,-170.64 626.43,-180 662.03,-180 v1(667,-184.97) ; v1(685,-625) 735,-575 820,-575 v1(850,-545) ; v1(800,-255) v1(850,-255)
  Bottom Layer w6: DISP1.9@188.58,1863.39 301.97,1750 465,1750 635,1580 635,198.79 655,178.79 655,22.57 624.62,-7.81 617.19,-7.81 600,-25 v1(600,-75) ; RP4.5@369,-1820 395.08,-1820 409.95,-1805.13 503.13,-1805.13 581,-1883 581,-1940.45 IC8.4@626.15,-1985.6 634.88,-1976.87 743.08,-1976.87 789.87,-1930.08 789.87,-1863.92 736.05,-1810.1 690.81,-1810.1 690.81,-1786.41 665.59,-1761.19 663.59,-1761.19 661,-1758.6 661,-1674.54 753,-1582.54 753,-1510.43 747.19,-1504.62 747.19,-1487.38 759.38,-1475.19 769.78,-1475.19 900,-1344.97 900,-1127 803.52,-1030.52 788.09,-1030.52 739.19,-981.62 739.19,-942.38 746,-935.57 746,-852 600,-706 600,-665 610,-655 653.39,-655 683.39,-625 v1(685,-625) ; v1(667,-184.97) 671.94,-184.97 693.41,-206.44 693.41,-207.99 740.41,-255 v1(800,-255) ; v1(850,-545) v1(850,-255) 850,-235 877.8,-207.2 IC1.9@877.8,-167.32
ADC_CH12/DISP_D3: DISP1.10 IC1.10 IC11.3 RP6.5 | length 4496.4
  Top Layer w6: v1(675,-25) 865,-25 900,-60 v1(900,-100)
  Bottom Layer w6: DISP1.10@188.58,1963.39 246.97,1905 310,1905 340,1875 340,1809.57 369.57,1780 475,1780 665,1590 665,211.21 685,191.21 685,10 675,0 v1(675,-25) ; v1(900,-100) 900,-120 897.48,-122.52 IC1.10@897.48,-167.32 896.35,-168.45 896.35,-210.62 875,-231.97 875,-400 1040,-565 1040,-1272.57 1042.81,-1275.38 1042.81,-1303.76 1034.19,-1312.38 1034.19,-1329.62 1075,-1370.43 1075,-1456 1092.15,-1473.15 IC11.3@1109.6,-1473.15 ; RP6.5@1040,-1816 RP6.5@1039,-1817 1039,-1783.04 1022,-1766.04 1022,-1721.03 1050,-1693.03 1071.97,-1693.03 1105,-1660 1105,-1625 1081,-1601 1081,-1572.49 1071.47,-1562.96 1071.47,-1518.53 IC11.3@1109.6,-1480.4
CON1_1: CON1.1 F1.1 IC4.6 | length 324.5
  Bottom Layer w8: IC4.6@-1103.15,-1717.6 -1067.6,-1717.6 -1060,-1710 -1060,-1660 -988,-1588 CON1.1@-988,-1547
  Bottom Layer w15: F1.1@-1062,-1540.37 -1050.37,-1540.37 -1040,-1530 -1005,-1530 CON1.1@-988,-1547
CON1_2: CON1.2 RP1.1 | length 131.2
  Bottom Layer w6: CON1.2@-938,-1647 -870,-1715 RP1.1@-870,-1750
CON1_3: CON1.3 RP1.2 | length 227.4
  Bottom Layer w6: CON1.3@-888,-1547 -888,-1672 -838.75,-1721.25 RP1.2@-838.75,-1754
CON1_4: CON1.4 RP1.3 | length 119.7
  Bottom Layer w6: CON1.4@-838,-1647 -838,-1692 -807.25,-1722.75 RP1.3@-807.25,-1754
CON1_5: CON1.5 RP1.4 | length 216.4
  Bottom Layer w6: CON1.5@-788,-1547 -785.19,-1549.81 -785.19,-1654.3 -774,-1665.49 RP1.4@-774,-1754 RP1.4@-776.53,-1751.47
CON1_6: CON1.6 RP2.1 | length 109
  Bottom Layer w6: CON1.6@-740,-1650 -740,-1690 -728,-1702 RP2.1@-728,-1754
CON1_7: CON1.7 RP2.2 | length 209.8
  Bottom Layer w6: RP2.2@-694.75,-1754 -694.75,-1604.75 -688,-1598 CON1.7@-688,-1547
CON1_8: CON1.8 RP2.3 | length 115.7
  Bottom Layer w6: RP2.3@-663.25,-1754 -663.25,-1678.25 CON1.8@-635,-1650
CON1_9: CON1.9 RP2.4 | length 224.4
  Bottom Layer w6: RP2.4@-630,-1754 -630,-1700.03 -599.47,-1669.5 -599.47,-1558.47 CON1.9@-588,-1547
CON2_1: con2.1 F2.1 IC8.3 | length 941.9
  Top Layer w6: v1(130,-1879) 326,-1879 v1(328,-1881)
  Bottom Layer w6: F2.1@2,-1482.37 -2,-1486.37 con2.1@-2,-1547 -23,-1568 -23,-1746.08 109.92,-1879 v1(130,-1879) ; v1(328,-1881) 328,-1923 392,-1987 518.45,-1987 IC8.3@519.85,-1985.6
CON2_2: con2.2 RP3.1 | length 117.3
  Bottom Layer w6: con2.2@50,-1660 116,-1726 RP3.1@116,-1750
CON2_3: con2.3 RP3.2 | length 220.4
  Bottom Layer w6: con2.3@100,-1550 100,-1665 149.25,-1714.25 RP3.2@149.25,-1750
CON2_4: con2.4 RP3.3 | length 112.7
  Bottom Layer w6: con2.4@150,-1650 150,-1670 180.75,-1700.75 RP3.3@180.75,-1750
CON2_5: con2.5 RP3.4 | length 225.9
  Bottom Layer w6: con2.5@200,-1545 200,-1588 190,-1598 190,-1690 215,-1715 RP3.4@215,-1750 ; RP3.4@209.47,-1745.47 RP3.4@214,-1750
CON2_6: con2.6 RP4.1 | length 112.5
  Bottom Layer w6: con2.6@248,-1647 248,-1693 271,-1716 RP4.1@271,-1750
CON2_7: con2.7 RP4.2 | length 201.8
  Bottom Layer w6: con2.7@300,-1550 300,-1590 304.25,-1594.25 RP4.2@304.25,-1750
CON2_8: con2.8 RP4.3 | length 105.9
  Bottom Layer w6: RP4.3@335.75,-1750 335.75,-1664.25 con2.8@350,-1650
CON2_9: con2.9 RP4.4 | length 224.3
  Bottom Layer w6: RP4.4@369,-1750 368.19,-1749.19 368.19,-1702.41 405,-1665.6 405,-1599 398,-1592 con2.9@398,-1547 con2.9@400,-1545
CON3_1: con3.1 F3.1 IC6.4 | length 750.7
  Bottom Layer w6: 550,-1650 550,-1694.25 IC6.4@552.6,-1696.85 552.6,-1637.4 561.19,-1628.81 569.62,-1628.81 581.81,-1616.62 581.81,-1608.19 645,-1545 663,-1545 664,-1546 con3.1@710,-1546 ; con3.1@710,-1547 con3.1@710,-1546 ; F3.1@815.37,-1232 845,-1232 888,-1275 888,-1340 823,-1405 812.6,-1405 710,-1507.6 con3.1@710,-1546
CON3_2: con3.2 RP5.1 | length 115.9
  Bottom Layer w6: con3.2@760,-1647 760,-1700 796,-1736 RP5.1@796,-1748
CON3_3: con3.3 RP5.2 | length 214.3
  Bottom Layer w6: con3.3@810,-1550 810,-1585 800,-1595 800,-1685 829.25,-1714.25 RP5.2@829.25,-1748
CON3_4: con3.4 RP5.3 | length 97.3
  Bottom Layer w6: RP5.3@860.75,-1748 con3.4@860.75,-1650.75
CON3_5: con3.5 RP5.4 | length 217.9
  Bottom Layer w6: RP5.4@894,-1748 894,-1692.57 911.38,-1675.19 919.81,-1675.19 920,-1675 920,-1595 910,-1585 con3.5@910,-1550
CON3_6: con3.6 RP6.1 | length 104.9
  Bottom Layer w6: RP6.1@941,-1747 941,-1714 960,-1695 con3.6@960,-1650
CON3_7: con3.7 RP6.2 | length 211.8
  Bottom Layer w6: RP6.2@974.25,-1747 974.25,-1695.75 1008,-1662 1008,-1552 con3.7@1010,-1550
CON3_8: con3.8 RP6.3 | length 119.5
  Bottom Layer w6: RP6.3@1005.75,-1747 1005.75,-1704.25 con3.8@1060,-1650
CON3_9: con3.9 RP6.4 | length 254.3
  Bottom Layer w6: RP6.4@1039,-1747 1039,-1721 1050,-1710 1075,-1710 1120,-1665 1120,-1620 1110,-1610 con3.9@1110,-1545
DISP_E: DISP1.6 IC1.52 | length 3181.6
  Top Layer w6: DISP1.6@-11.42,1963.39 40,1911.97 40,1825 47,1818 v1(47,1770)
  Bottom Layer w6: v1(47,1770) 52.81,1775.81 104.62,1775.81 117.19,1763.24 117.19,1752.78 149.97,1720 455,1720 605,1570 605,208.97 575,178.97 575,50 410,-115 410,-369.77 428.92,-388.69 428.92,-403.92 499.41,-474.41 IC1.52@649.45,-474.41
DISP_RS: DISP1.4 IC1.53 | length 3313.9
  Bottom Layer w6: DISP1.4@-111.42,1963.39 -151.42,1923.39 -151.42,1846.82 -95.41,1790.81 106.59,1790.81 129.19,1768.21 129.19,1757.75 151.94,1735 460,1735 620,1575 620,200 590,170 590,45 440,-105 440,-150 425,-165 425,-367.8 440.92,-383.72 440.92,-394.92 500.72,-454.72 IC1.53@649.45,-454.72
GND: C1.2 C2.2 C3.2 C4.2 C5.2 C6.2 C7.2 C8.2 C9.2 C10.2 C11.2 C12.2 C14.2 C15.2 C16.2 C17.2 C18.2 C19.2 C20.2 C21.2 C22.2 C23.2 C24.2 C25.1 C26.2 C27.2 C28.2 C29.2 C30.2 C31.2 C32.2 C33.2 C34.2 C35.2 C36.2 C37.2 C38.2 C39.2 C40.2 C42.1 CON1.10 con2.10 con3.10 CON4.C4 CON4.C5 CON4.G1 CON4.G2 CON4.G3 CON4.G4 DISP1.1 IC1.12 IC1.18 IC1.31 IC1.47 IC1.63 IC2.2 IC3.3 IC3.4 IC3.6 IC3.19 IC3.20 IC3.29 IC3.37 IC3.38 IC3.41 IC3.42 IC3.43 IC3.44 IC4.2 IC4.5 IC5.2 IC5.5 IC6.2 IC6.5 IC7.2 IC7.5 IC8.2 IC8.5 IC9.2 IC9.5 IC10.2 IC10.5 IC11.2 IC11.5 IC12.2 IC13.2 IC14.2 IC15.1 IC16.3 IC16.8 IC17.4 IC20.6 IC20.7 IC20.8 IC21.6 IC21.7 IC21.8 IC22.3 IC22.5 IC22.16 IC22.23 IC22.24 IC22.51 IC22.52 IC22.53 IC22.54 IC29.5 IC29.8 IC29.26 IC29.27 IC29.29 IC29.30 J3.2 J5.0a J5.0b J5.0c J5.0d J5.5 J6.2 J6.2a KBD1.10 KBD1.10a KBD1.10b KBD1.10c KBD1.10d P15.2 P15.3 P15.4 P15.6 P15.8 P15.10 P15.14 pad.1 Q4.2 Q5.2 R2.2 R3.1 R4.1 R7.1 R8.1 R15.1 R16.2 R41.2 R42.2 S1.3 S1.4 SW1.1 USR.K VR1.1 | length 3005.8
  Top Layer w6: IC3.3@187.36,685.55 IC3.4@207.05,685.55 207.05,657.95 215,650 240,650 246.42,656.42 IC3.6@246.42,685.55 ; SW1.1@1059.45,879.33 1101.67,879.33 v1(1105,876)
  Top Layer w8: v1(-821,-297) -820,-298 CON4.C4@-772,-298 ; CON4.C5@-772,-398 -732,-398 -731,-399 -730,-399 v1(-727,-396) ; J6.2a@-600,1440 -535.03,1440 v1(-534.98,1439.95) ; J6.2@-600,1554.17 -538.87,1554.17 v1(-534.98,1558.06) ; IC15.1@-238.5,-1911.76 -238.5,-1954.5 v1(-238,-1955) ; v1(-50,675) -50,655 -46.89,651.89 IC3.44@-46.89,579.25 ; IC3.6@246.42,685.55 246.42,706.42 249.57,709.57 v1(249.57,724.57)
  Top Layer w10: IC3.43@-220.12,1598.94 -220.12,1510.12 -181.34,1471.34 IC29.27@-181.34,1401.85 ; v1(230,-700) 232.36,-702.36 IC16.3@232.36,-757.46 ; v1(510,-700) 527.64,-717.64 IC16.8@527.64,-757.46
  Top Layer w15: IC29.30@-311.26,1401.85 -311.26,1306.26 -275,1270 v1(-275,1225) ; IC29.29@-267.95,1401.85 -267.95,1292.95 -250,1275 v1(-250,1225) ; IC29.27@-181.34,1401.85 -181.34,1323.66 -225,1280 v1(-225,1225) -200,1250 -200,1275 -138.03,1336.97 IC29.26@-138.03,1401.85 v1@-138.03,1472.2
  Bottom Layer w6: v1(-718,-1919) -736.52,-1937.52 -736.52,-1959.52 -739,-1962 -736.52,-1964.48 -736.52,-1969.14 -714.66,-1991 IC5.2@-706.85,-1991 ; C29.2@-176.73,1673.23 -176.73,1479.88 -169.29,1472.44 v1(-137.8,1472.44)
  Bottom Layer w8: v1(-1230,457) -1178.1,457 C18.2@-1173,451.9 ; C17.2@-1176,237.9 -1124.1,237.9 v1(-1119,243) ; IC14.2@-1138,-307 -1138,-348 v1(-1136,-350) ; R3.1@-1094.5,608 -1094.5,643.5 v1(-1094,644) ; C19.2@-1064.9,-219 -1017,-219 v1(-1016,-220) ; v1(-1059,403) -1056,406 IC13.2@-1056,440 ; v1(-967,-372) -964,-375 C20.2@-915.9,-375 ; v1(-601,96) Q4.2@-601,126 ; J5.5@-332.99,-1786.28 J5.5@-330,-1783.28 ; C6.2@193.5,-873 193.5,-838.5 v1(197,-835) ; C26.2@235.43,675 235.43,710.43 v1(249.57,724.57) ; IC12.2@923.85,1861 959,1861 v1(960,1862) ; R7.1@1075.5,1969 1104,1969 v1(1106,1967)
  Bottom Layer w10: C39.2@-25,-725 -8.74,-741.26 IC2.2@50,-741.26
  Bottom Layer w15: IC4.5@-1103.15,-1755 IC4.2@-996.85,-1755 v1@-945,-1755 ; v1(-275,1225) v1(-250,1225) v1(-225,1225) C22.2@-146.06,1225
  other v1: -631,-2052 -772,-2051 225,-2050 -1050,-2043 -191,-2040 466,-2025 397,-2024 679,-2023 -7,-2016 724,-2014 -267,-2002 -512,-1993 -377,-1990 125,-1972 333,-1966 -613,-1947 -101,-1930 539,-1919 603,-1908 191,-1903 267,-1902 -807,-1891 600,-1841 -1104,-1837 -506,-1791 -368,-1786 -950,-1758 -1052,-1748 604,-1737 -550,-1735 453,-1728 -448,-1715 -1119,-1684 -1028,-1677 -1100,-1650 627,-1635 561,-1608 657,-1600 -822,-1597 -721,-1593 491,-1571 601,-1535 442,-1505 -1136,-1484 -172,-1483 687,-1483 -367,-1469 -559,-1465 -1001,-1457 149,-1430 207,-1427 -980,-1426 736,-1412 -245,-1353 -367,-1343 314,-1339 499,-1336 364,-1330 -140,-1291 107,-1286 -976,-1269 215,-1269 -559,-1255 -641,-1248 -697,-1246 -766,-1244 -799,-1243 -1000,-1237 254,-1216 -1071,-1199 161,-1195 -375,-1177 -9,-1163 -223,-1149 -1142,-1107 876,-1054 500,-1047 -933,-1040 180,-1034 73,-1029 261,-1013 -284,-1011 356,-1006 -616,-1003 516,-1001 -696,-1000 -705,-889 -542,-883 -105,-882 103,-815 -1133,-796 -185,-782 -83,-773 709,-730 753,-730 1107,-707 1212,-701 111,-693 -55,-678 740,-650 273,-625 521,-612 -558,-608 144,-606 1089,-580 -216,-570 -1123,-562 881,-549 -136,-537 -496,-517 -596,-514 1393,-509 110,-469 -539,-448 1161,-439 -282,-432 -580,-398 -494,-398 -1098,-366 -1182,-360 1301,-327 245,-319 -298,-312 191,-309 -579,-294 -212,-294 -468,-290 -876,-284 1120,-211 -217,-209 1300,-207 -303,-202 -890,-199 -420,-199 -551,-194 1044,-162 60,-140 355,-137 174,-130 479,-123 298,-119 543,-118 854,-56 548,-48 1074,-47 175,-30 424,-28 900,48 629,57 -22,92 -390,100 -350,100 -310,100 195,100 225,100 -188,102 460,103 17,104 70,105 1043,112 848,159 -425,175 1107,176 705,220 912,225 1036,230 498,243 -380,245 -45,250 -425,275 -350,275 846,281 967,286 1320,287 150,300 -350,350 150,375 1013,439 1314,447 435,450 465,450 -66,453 -193,457 -435,469 924,491 -300,500 -300,550 155,550 928,564 155,580 195,580 -300,600 1250,600 1003,622 475,635 -300,650 -433,662 -167,677 -99,677 400,740 440,740 -233,782 -45,795 -375,800 390,825 545,825 -225,850 -45,855 702,860 -375,900 -45,920 -175,925 -115,925 435,925 505,925 391,948 -225,950 -550,975 -45,985 -375,1000 390,1020 -550,1050 -225,1050 -45,1050 850,1050 704,1084 -375,1100 -45,1115 -175,1125 -115,1125 435,1125 510,1125 -225,1150 -45,1180 390,1225 545,1225 714,1229 978,1239 -45,1245 -210,1250 1081,1276 1285,1285 365,1320 430,1320 490,1320 695,1360 850,1400 550,1422 719,1426 1262,1428 1041,1435 -659,1502 778,1516 712,1524 445,1525 533,1527 -220,1531 970,1534 286,1538 -63,1566 1245,1573 -509,1585 375,1592 774,1604 -952,1606 902,1610 1099,1612 -622,1621 -63,1663 694,1667 1236,1674 -227,1679 975,1682 -848,1689 -291,1731 -658,1733 1101,1738 -85,1759 619,1770 976,1780 -914,1791 810,1791 1077,1826 1197,1832 -768,1864 -364,1865 695,1892 1166,1963 935,1964 703,1973 884,1980 621,1992
GPS_PWR_OFF: IC1.56 P15.12 Q3.1 R9.1 | length 1975.7
  Top Layer w6: v1(-167,-360) -152.68,-345.68 146.31,-345.68 190.63,-390 313.75,-390 327.32,-376.43 365.75,-376.43 389.32,-400 v1(575,-400) ; v1(720,-290) 775.81,-234.19 858.62,-234.19 894.24,-269.81 1045.07,-269.81 1064.88,-250 P15.12@1250,-250
  Bottom Layer w6: Q3.1@-169,-730 -169,-362 v1(-167,-360) ; v1(575,-400) 595,-400 600,-395 IC1.56@648.78,-395 ; IC1.56@649.45,-395.67 IC1.56@648.78,-395 ; v1(720,-290) 720,-385 710,-395 IC1.56@648.78,-395
GSM_ON_OFF: IC1.28 IC3.31 IC22.26 IC29.14 | length 2377.2
  Top Layer w6: IC22.26@212.68,32.72 v1(212.68,-25) 375,-25 v1(400,-50) ; v1(263,-585) 294.8,-553.2 400.54,-553.2 434.75,-519 612,-519 676,-455 761.63,-455 781.44,-435.19 818.56,-435.19 838.37,-455 1000,-455 1005,-450 v1(1025,-450) ; IC3.31@344.84,504.45 344.84,450.16 360,435 415,435 440.71,409.29 IC29.14@440.71,339.84 440,339.13 v1(440,260)
  Bottom Layer w6: v1(212.68,-25) 212.68,-402.68 260.81,-450.81 260.81,-582.81 v1(263,-585) ; v1(400,-50) 400,185 440,225 v1(440,260) ; v1(1025,-450) 1040,-450 1044.72,-454.72 IC1.28@1086.46,-454.72